# Altium PCB PCB1.PcbDoc
Units mm, origin at the board's own origin, x right, y up, seen from the top; angles counter-clockwise.
Board outline 36.07 x 37.85 mm, 2 copper layers (Top Layer, Bottom Layer); 16 components, 12 nets, 46 pads, 15 vias.
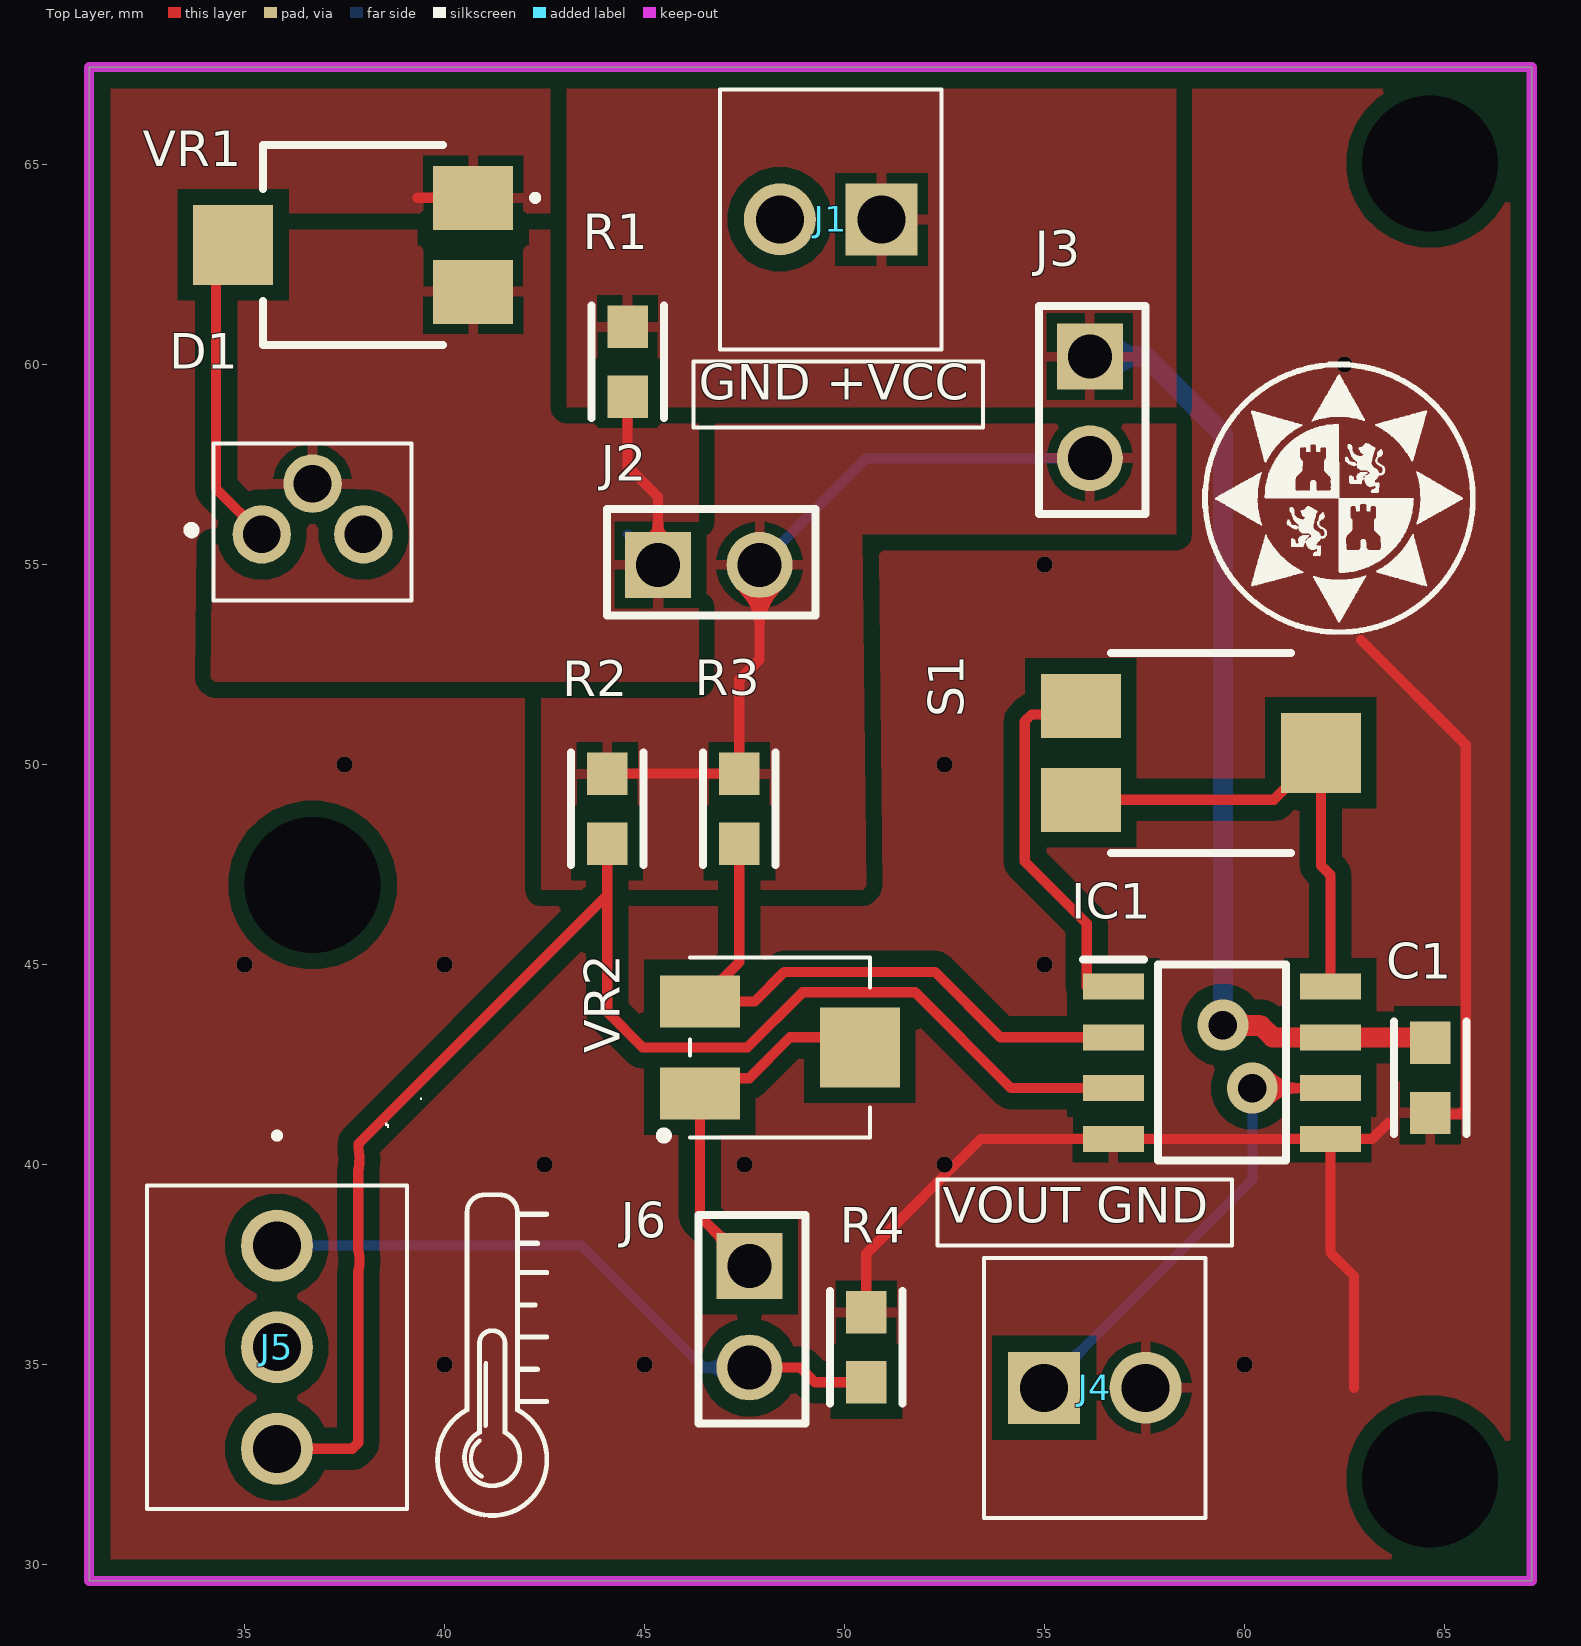
[diagram p0: Top Layer view]
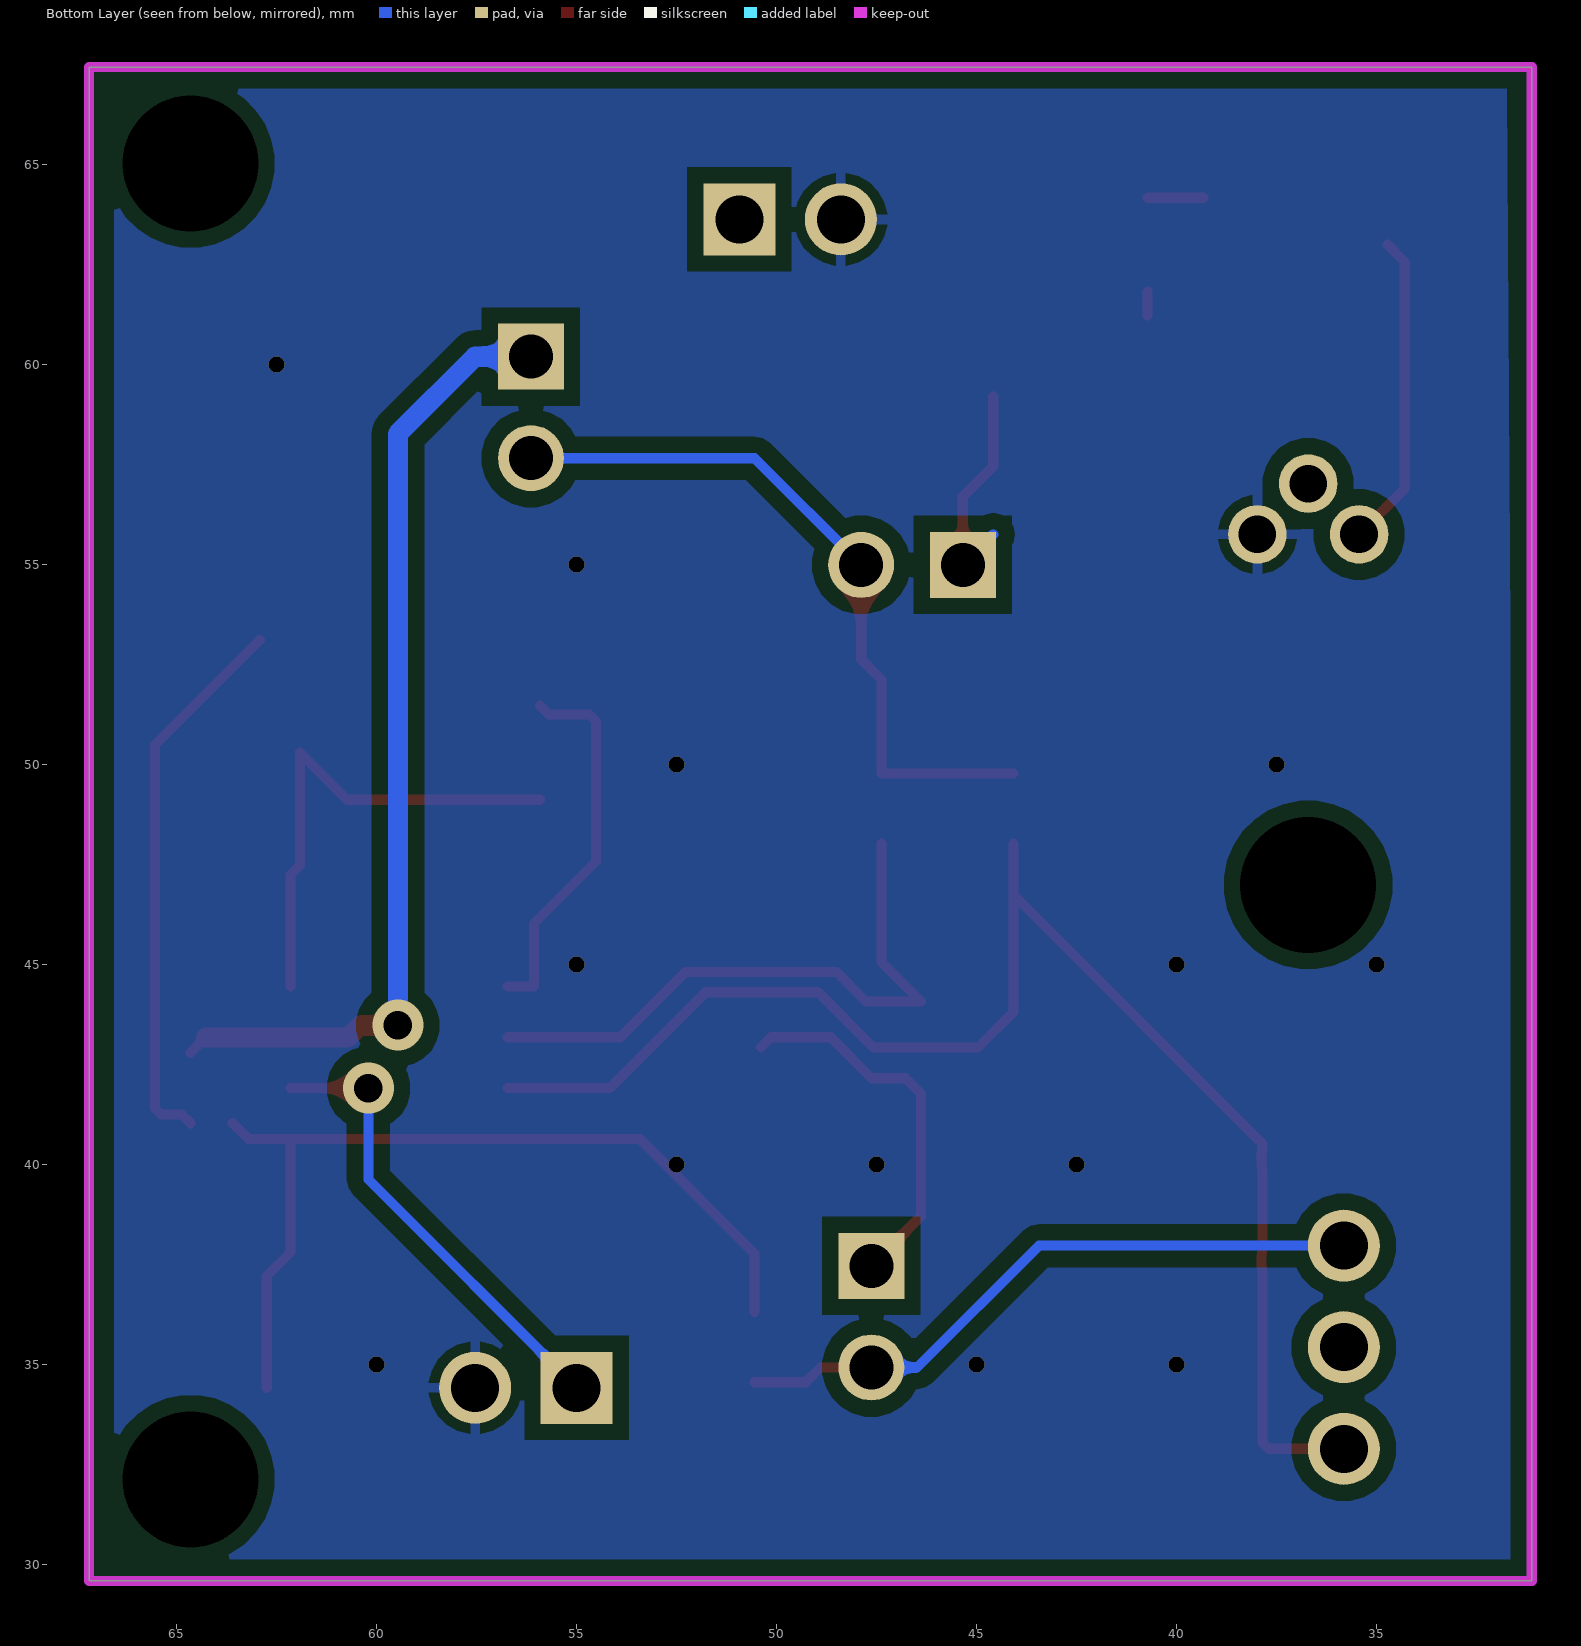
[diagram p1: Bottom Layer view, seen from below]
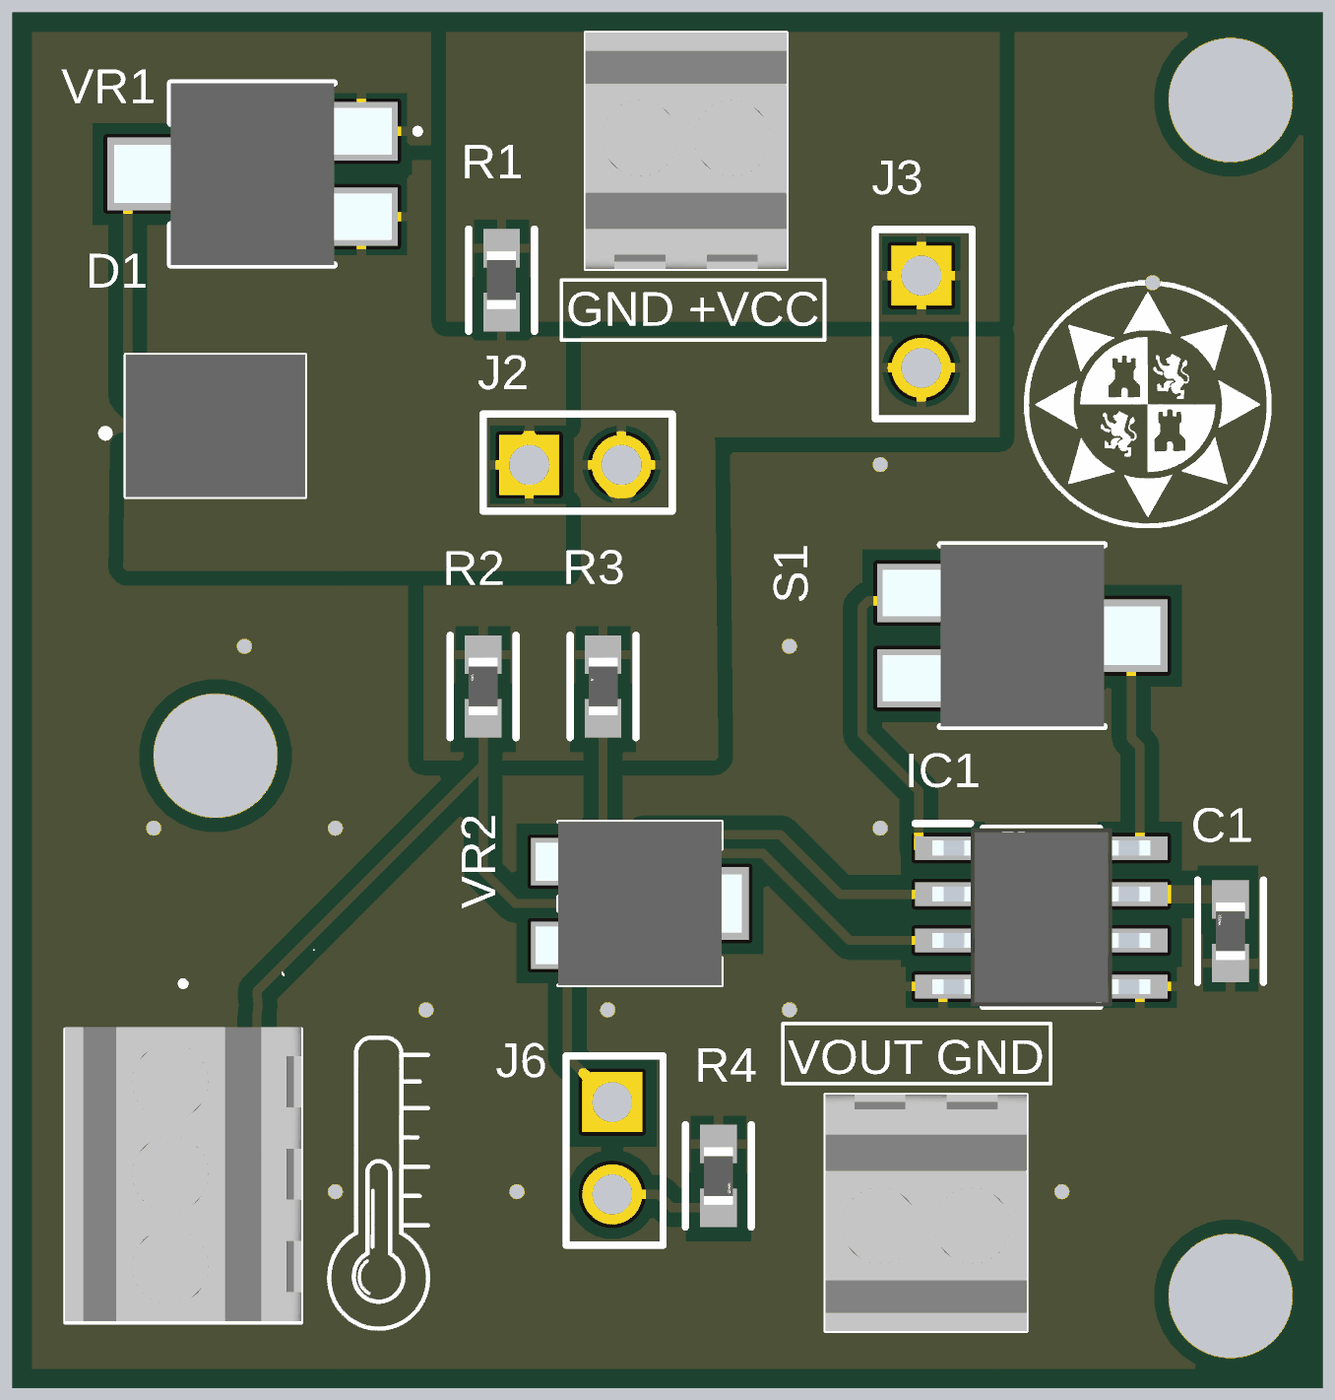
[diagram p2: 3D render of the assembled board from above, using the file's embedded part models]

## Layer stack, top to bottom
Top Solder: solder mask 0.0102, Solder Resist, Dk 3.5
Top Layer: signal copper 0.0356
Dielectric 1: dielectric 0.32, FR-4, Dk 4.8
Bottom Layer: signal copper 0.0356
Bottom Solder: solder mask 0.0102, Solder Resist, Dk 3.5

## Board outline
31.115,29.591 31.115,67.437 67.183,67.437 67.183,29.591

## Design rules (kind name [scope] priority, off if disabled: settings)
Clearance [All] p1: gap=0.254 ignorepadtopadclearanceinfootprint=FALSE except(0: Arc-Hole Track-Hole SMDPad-Hole Via-Hole Fill-Hole Region-Hole Text-Hole; 0.4: Arc-THPad Arc-Poly Track-THPad Track-Poly SMDPad-THPad SMDPad-Poly THPad-THPad THPad-Via THPad-Fill THPad-Poly THPad-Region THPad-Text THPad-Hole Via-Poly Fill-Poly Poly-Poly Poly-Region Poly-Text Poly-Hole)
PolygonConnect [All] p1: connectstyle=Relief reliefconductorwidth=0.254 reliefentries=4 polygonreliefangle="90 Angle" airgapwidth=0.254
RoutingVias [All] p1: holewidth=0.711 width=1.27 viastyle="Through Hole" minholewidth=0.711 minwidth=1.27 maxholewidth=0.711 maxwidth=1.27
SolderMaskExpansion SolderMaskExpansion_Via [IsVia] p1: expansion=0.102 istentingtop=TRUE
SolderMaskExpansion [All] p2: expansion=0.102 istentingtop=FALSE
Width [All] p1: maxlimit=0.5 minlimit=0.254 preferedwidth=0.254 minimp=50.000000 maximp=50.000000 favimp=50.000000
30 further rules are at their usual default settings.

## Components (designator, comment, footprint, x,y, rotation, side; value= is the part's Value field where it differs from the comment)
C1 "Ceramic_Capacitor" 0603 64.643,42.164 r90 top
D1 "LM336Z-5.0_NOPB" LM336Z50NOPB 36.671,56.063 r0 top
IC1 "AD623ARZ" SOIC127P600X175-8N 59.436,42.545 r0 top
J1 "282834-2" 282834-2_1 50.927,63.627 r180 top
J2 "MOLEX,_C-GRID_III" HDRV8W65P0X254_1X8_2010X249X945P 45.339,54.991 r0 top
J3 "MOLEX,_C-GRID_III" HDRV8W65P0X254_1X8_2010X249X945P 56.134,60.198 r270 top
J4 "282834-2" 282834-2_1 54.991,34.417 r0 top
J5 "282834-3" 2828343 35.814,37.973 r270 top
J6 "MOLEX,_C-GRID_III" HDRV8W65P0X254_1X8_2010X249X945P 47.625,37.465 r270 top
R1 "Resistor" 0603 44.577,60.071 r90 top
R2 "Resistor" 0603 44.069,48.895 r90 top
R3 "Resistor" 0603 47.371,48.895 r90 top
R4 "Resistor" 0603 50.546,35.433 r270 top
S1 "ST-4ETB102" ST4ETB102 58.911,50.292 r270 top
VR1 "ST-4ETB103" ST4ETB103 37.719,62.992 r90 top
VR2 "3314J-1-201E" 3314J1201E 48.387,42.926 r270 top

## Footprints (in the part's own frame and the unit in brackets; to place one, negate y for a bottom-side part, rotate by r counter-clockwise, add the part's x,y. Pads: shape width x height; smd on the part's side, far side on the other; paste and mask are expansions set on the pad)
0603 [mm]
  rect 1.059x1.012 smd paste+0 mask+0: 1(-0.877,0) 2(0.877,0)
  silkscreen extent -1.41,-0.91 1.41,0.91, body extent -1.91,-1.01 1.91,1.01, height 0.25
3314J1201E [mm]
  rect 1.3x2 smd: 1(1.15,-2) 3(-1.15,-2)
  rect 2x2 smd: 2(0,2)
  silkscreen extent -2.25,-3 2.3,2.25, body extent -2.25,-2.87 2.25,2.8, height 2.65
282834-2_1 [mm]
  rect 1.8x1.8 hole 1.2: 1(0,0)
  round 1.8 hole 1.2: 2(2.54,0)
  silkscreen extent -1.5,-3.25 4.04,3.25, body extent -1.5,-3.25 4.04,3.25, height 9.87
2828343 [mm]
  round 1.8 hole 1.2: 1(0,0) 2(2.54,0) 3(5.08,0)
  silkscreen extent -2.8,-3.25 6.58,3.25, body extent -1.55,-3.25 6.53,3.25, height 9.89
HDRV8W65P0X254_1X8_2010X249X945P [mm]
  rect 1.65x1.65 hole 1.1: 1(0,0)
  round 1.65 hole 1.1: 2(2.54,0)
  silkscreen extent -1.27,-1.27 3.94,1.4
LM336Z50NOPB [mm]
  round 1.462 hole 0.94: 1(-1.238,-0.31) 2(0.032,0.96) 3(1.302,-0.31)
  silkscreen extent -3.1,-1.96 2.51,1.96, body extent -2.44,-1.96 2.51,1.96, height 4.1
SOIC127P600X175-8N [mm]
  rect 1.525x0.65 smd: 1(-2.712,1.905) 2(-2.712,0.635) 3(-2.712,-0.635) 4(-2.712,-1.905) 5(2.712,-1.905) 6(2.712,-0.635) 7(2.712,0.635) 8(2.712,1.905)
  silkscreen extent -3.47,-2.45 1.6,2.58, body extent -3,-2.45 3,2.45, height 1.75
ST4ETB102 [mm]
  rect 1.6x2 smd: 1(1.175,-3) 3(-1.175,-3)
  rect 2x2 smd: 2(0,3)
  silkscreen extent -2.5,-2.25 2.5,2.25, body extent -2.5,-3.84 2.5,3.8, height 2.55
ST4ETB103 [mm]
  rect 1.6x2 smd: 1(1.175,-3) 3(-1.175,-3)
  rect 2x2 smd: 2(0,3)
  silkscreen extent -2.5,-4.6 2.5,2.25, body extent -2.5,-3.84 2.5,3.8, height 2.7

## Part data
C1: "0.1 µF ±10% 50V Capacitores cerámicos X7R 0603 (1608 métrico)", Package=None, Availability=Unavailable, MF=Samsung, MP=CL10B104KB8NNNC, Price=None
D1: "Diode", Arrow Part Number=LM336Z-5.0/NOPB, Manufacturer_Name="Texas Instruments", Mouser Part Number=926-LM336Z-50/NOPB, Arrow Price/Stock=https://www.arrow.com/en/products/lm336z-5.0nopb/texas-instruments?region=nac, Datasheet Link=https://datasheet.datasheetarchive.com/originals/distributors/Datasheets-SFU2/DSASFU100037156.pdf, Height=4mm, Manufacturer_Part_Number=LM336Z-5.0/NOPB, Mouser Price/Stock=https://www.mouser.co.uk/ProductDetail/Texas-Instruments/LM336Z-5.0-NOPB?qs=X1J7HmVL2ZHN7YUiEmoZyA%3D%3D
IC1: "Integrated Circuit", Manufacturer_Name="Analog Devices", Mouser Part Number=584-AD623ARZ, Arrow Part Number=AD623ARZ, Arrow Price/Stock=https://www.arrow.com/en/products/ad623arz/analog-devices?region=nac, Datasheet Link=http://uk.rs-online.com/web/p/products/8065522, Height=1.75mm, Manufacturer_Part_Number=AD623ARZ, Mouser Price/Stock=https://www.mouser.co.uk/ProductDetail/Analog-Devices/AD623ARZ?qs=NmRFExCfTkGK6FtzXpd45Q%3D%3D
J1 J4: "Connector", Manufacturer_Name="TE Connectivity", Mouser Part Number=571-282834-2, Arrow Part Number=282834-2, Arrow Price/Stock=https://www.arrow.com/en/products/282834-2/te-connectivity?region=europe, Datasheet Link=https://www.te.com/commerce/DocumentDelivery/DDEController?Action=srchrtrv&DocNm=1-1773458-1_EURO_STYLE_QRG&DocType=Data+Sheet&DocLang=English&PartCntxt=282834-2&DocFormat=pdf, Manufacturer_Part_Number=282834-2, Mouser Price/Stock=https://www.mouser.co.uk/ProductDetail/TE-Connectivity/282834-2?qs=A%252Bip%252BNCYi6N8cVKuk8xDog%3D%3D
J2 J3 J6: library part MOLEX,_C-GRID_III,_90120,_8_WAY,_1_ROW,_STRAIGHT_PIN_HEADER, "Connector", Manufacturer_Name=Molex, Manufacturer_Part_Number=MOLEX, Datasheet Link=https://www.molex.com/pdm_docs/sd/901200128_sd.pdf, Height=9.45mm
J5: "Connector", Manufacturer_Name="TE Connectivity", Mouser Part Number=571-2828343, Arrow Part Number=282834-3, Arrow Price/Stock=https://www.arrow.com/en/products/282834-3/te-connectivity?region=europe, Datasheet Link=https://www.te.com/commerce/DocumentDelivery/DDEController?Action=showdoc&DocId=Customer+Drawing%7F282834%7FC1%7Fpdf%7FEnglish%7FENG_CD_282834_C1.pdf%7F282834-3, Height=10mm, Manufacturer_Part_Number=282834-3, Mouser Price/Stock=https://www.mouser.co.uk/ProductDetail/TE-Connectivity/282834-3?qs=A%252Bip%252BNCYi6M69kAjqV38yA%3D%3D
R1 R4: Manufacturer=Yageo, Manufacturer Part number=RC0603FR-071K2L
R2 R3: Manufacturer=Yageo, Manufacturer Part number=RC0603FR-074K7L
S1: "Switch", Manufacturer_Name="NIDEC COPAL", Mouser Part Number=229-ST-4ETB102, Datasheet Link=https://www.mouser.com/datasheet/2/972/st_4-1827515.pdf, Height=2.45mm, Manufacturer_Part_Number=ST-4ETB102, Mouser Price/Stock=https://www.mouser.co.uk/ProductDetail/Nidec-Copal/ST-4ETB102?qs=XeJtXLiO41QhX9uihnXhqQ%3D%3D
VR1: "Variable Resistor", Manufacturer_Name="NIDEC COPAL", Mouser Part Number=229-ST-4ETB103, Datasheet Link=https://www.nidec-copal-electronics.com/e/catalog/trimmer/st-4.pdf, Height=2.6mm, Manufacturer_Part_Number=ST-4ETB103, Mouser Price/Stock=https://www.mouser.co.uk/ProductDetail/Nidec-Copal/ST-4ETB103?qs=XeJtXLiO41S8fGnbwPrKRA%3D%3D
VR2: "Variable Resistor", Manufacturer_Name=Bourns, Mouser Part Number=652-3314J-1-201E, Arrow Part Number=3314J-1-201E, Arrow Price/Stock=https://www.arrow.com/en/products/3314j-1-201e/bourns?region=europe, Datasheet Link=https://www.bourns.com/docs/Product-Datasheets/3314.pdf, Height=2.55mm, Manufacturer_Part_Number=3314J-1-201E, Mouser Price/Stock=https://www.mouser.com/Search/Refine.aspx?Keyword=652-3314J-1-201E

## Free pads (board coordinates)
  round 1.524 hole 3.4: 2(36.703,46.99) 2(64.643,32.131) 2(64.643,65.024)

## Via types
v1: diameter 0.4, hole 0.4, Top Layer to Bottom Layer, tented both sides, 13 vias
v2: diameter 1.27, hole 0.711, Top Layer to Bottom Layer, tented both sides, 2 vias

## Nets (pads, with @x,y where several pads share a name; then routed paths per layer and width w, separated by ;. In a path a pad name is that pad's centre, name@x,y a point inside that pad or via, vN(x,y) a via of type N, cw(c..) or ccw(c..) an arc to the next point about the centre after c; other vN are vias at no path point)
+VCC: C1.2 IC1.7 J1.1 J3.1 R1.2 | length 24.4
  Top Layer w0.254: C1.2@64.264,43.18 64.643,42.801 C1.2@64.643,42.787
  Top Layer w0.5: v2(59.461,43.485) 59.471,43.475 60.411,43.475 60.706,43.18 C1.2@64.264,43.18
  Bottom Layer w0.5: J3.1 57.531,60.198 59.461,58.268 v2(59.461,43.485)
+VIN: IC1.3 J5.3 R2.1 | length 37.6
  Top Layer w0.254: J5.3@35.347,32.893 37.697,32.893 37.846,33.042 37.846,37.301 ccw(c36.449,37.592) 37.846,37.883 37.846,39.841 ccw(c36.449,40.132) 37.852,40.392 37.852,40.414 37.852,40.519 44.069,46.736 ; R2.1 44.069,46.736 ; IC1.3 54.165,41.91 51.768,44.307 48.955,44.307 47.574,42.926 44.958,42.926 44.069,43.815 44.069,46.736
-VIN: IC1.2 R3.1 VR2.3 | length 15.7
  Top Layer w0.254: R3.1 47.371,45.06 VR2.3 47.759,44.076 48.498,44.815 52.264,44.815 53.899,43.18 IC1.2
GND: C1.1 D1.3 IC1.4 IC1.5 J1.2 J4.2 R4.1 VR1.1 | length 37.6
  Top Layer w0.254: 39.326,64.167 VR1.1 ; J1.2@48.31,63.627 J1.2 ; R4.1 50.546,37.77 53.416,40.64 IC1.4 IC1.5 ; 62.738,34.417 62.738,37.211 62.148,37.801 IC1.5 ; 62.916,53.111 65.532,50.495 65.532,41.402 65.381,41.251 64.861,41.251 C1.1@64.643,41.033 ; 63.588,41.033 63.195,40.64 IC1.5
  other v1: 40,35 45,35 60,35 42.5,40 47.5,40 52.5,40 35,45 40,45 55,45 37.5,50 52.5,50 55,55 62.5,60
NetD1_1: D1.1 VR1.2 | length 7.9
  Top Layer w0.254: VR1.2 34.29,62.563 34.29,56.896 D1.1
NetD1_2: D1.2 J2.1 R1.1 VR1.3 | length 6.2
  Top Layer w0.254: VR1.3@40.719,61.223 VR1.3 ; R1.1 44.577,57.455 45.339,56.693 J2.1
  Bottom Layer w0.254: J2.1@44.577,55.753 J2.1
NetIC1_6: IC1.6 J4.1 | length 11.6
  Top Layer w0.254: v2(60.198,41.91) IC1.6
  Bottom Layer w0.254: J4.1 60.198,39.624 v2(60.198,41.91)
NetJ2_2: J2.2 J3.2 R2.2 R3.2 | length 18.1
  Top Layer w0.254: R2.2 R3.2 47.371,52.121 47.879,52.629 J2.2
  Bottom Layer w0.254: J2.2 50.546,57.658 J3.2
NetJ5_1: J5.1 J6.2 R4.2 | length 16.1
  Top Layer w0.254: J6.2 48.895,34.925 49.264,34.556 R4.2
  Bottom Layer w0.254: J5.1 43.434,37.973 46.482,34.925 J6.2
NetJ6_1: J6.1 VR2.1 VR2.2 | length 9.5
  Top Layer w0.254: J6.1 46.387,38.703 VR2.1 46.769,42.158 47.619,42.158 48.641,43.18 50.133,43.18 VR2.2
RG+: IC1.8 S1.1 S1.2 | length 12.4
  Top Layer w0.254: S1.1 60.736,49.117 S1.2 61.911,47.481 62.148,47.244 IC1.8
RG-: IC1.1 S1.3 | length 9.5
  Top Layer w0.254: S1.3 55.693,51.249 54.678,51.249 54.508,51.079 54.508,47.574 56.058,46.025 56.058,44.45 IC1.1
pads on no net: J5.2

## Polygon pours and split planes (outlines as drawn)
GND on Top Layer "NONET_L-01_P-001" (solid, pour order 3): 31.369,67.37 66.929,67.37 66.929,29.778 31.369,29.778
NetD1_2 on Top Layer "NONET_L-01_P-001" (solid, pour order 1): 34.163,52.07 46.355,52.07 46.355,63.373 34.29,63.373
NetJ2_2 on Top Layer "NONET_L-01_P-001" (solid, pour order 2): 50.451,55.752 58.293,55.752 58.293,58.801 42.418,58.801 42.418,46.863 50.546,46.863
+VCC on Top Layer "NONET_L-01_P-001" (solid, pour order 0): 58.293,58.928 43.053,58.928 43.053,68.072 58.293,68.072
GND on Bottom Layer "NONET_L-01_P-001" (solid, pour order 4): 31.75,67.945 66.548,67.945 66.548,30.099 31.496,30.099

## Keep-outs
Keep-Out Layer:
  the board outline again, w0.254

## Silkscreen, mask and mechanical layers (free items; w line width, h text height)
Top Overlay:
  drawing of 29 lines, arcs and shapes, not listed
  text "GND +VCC" at 46.355,58.817 h1.52
  text "VOUT GND" at 52.452,38.243 h1.52

## Dimensions
67.183,29.591 to 67.183,67.437 on Mechanical 15
31.115,29.591 to 67.183,29.591 on Mechanical 15